# Altium PCB Control_Board.PcbDoc
Units mm, origin at the board's own origin, x right, y up, seen from the top; angles counter-clockwise.
Board outline 99 x 99 mm, 2 copper layers (Top Layer, Bottom Layer); 52 components, 36 nets, 165 pads, 17 vias.
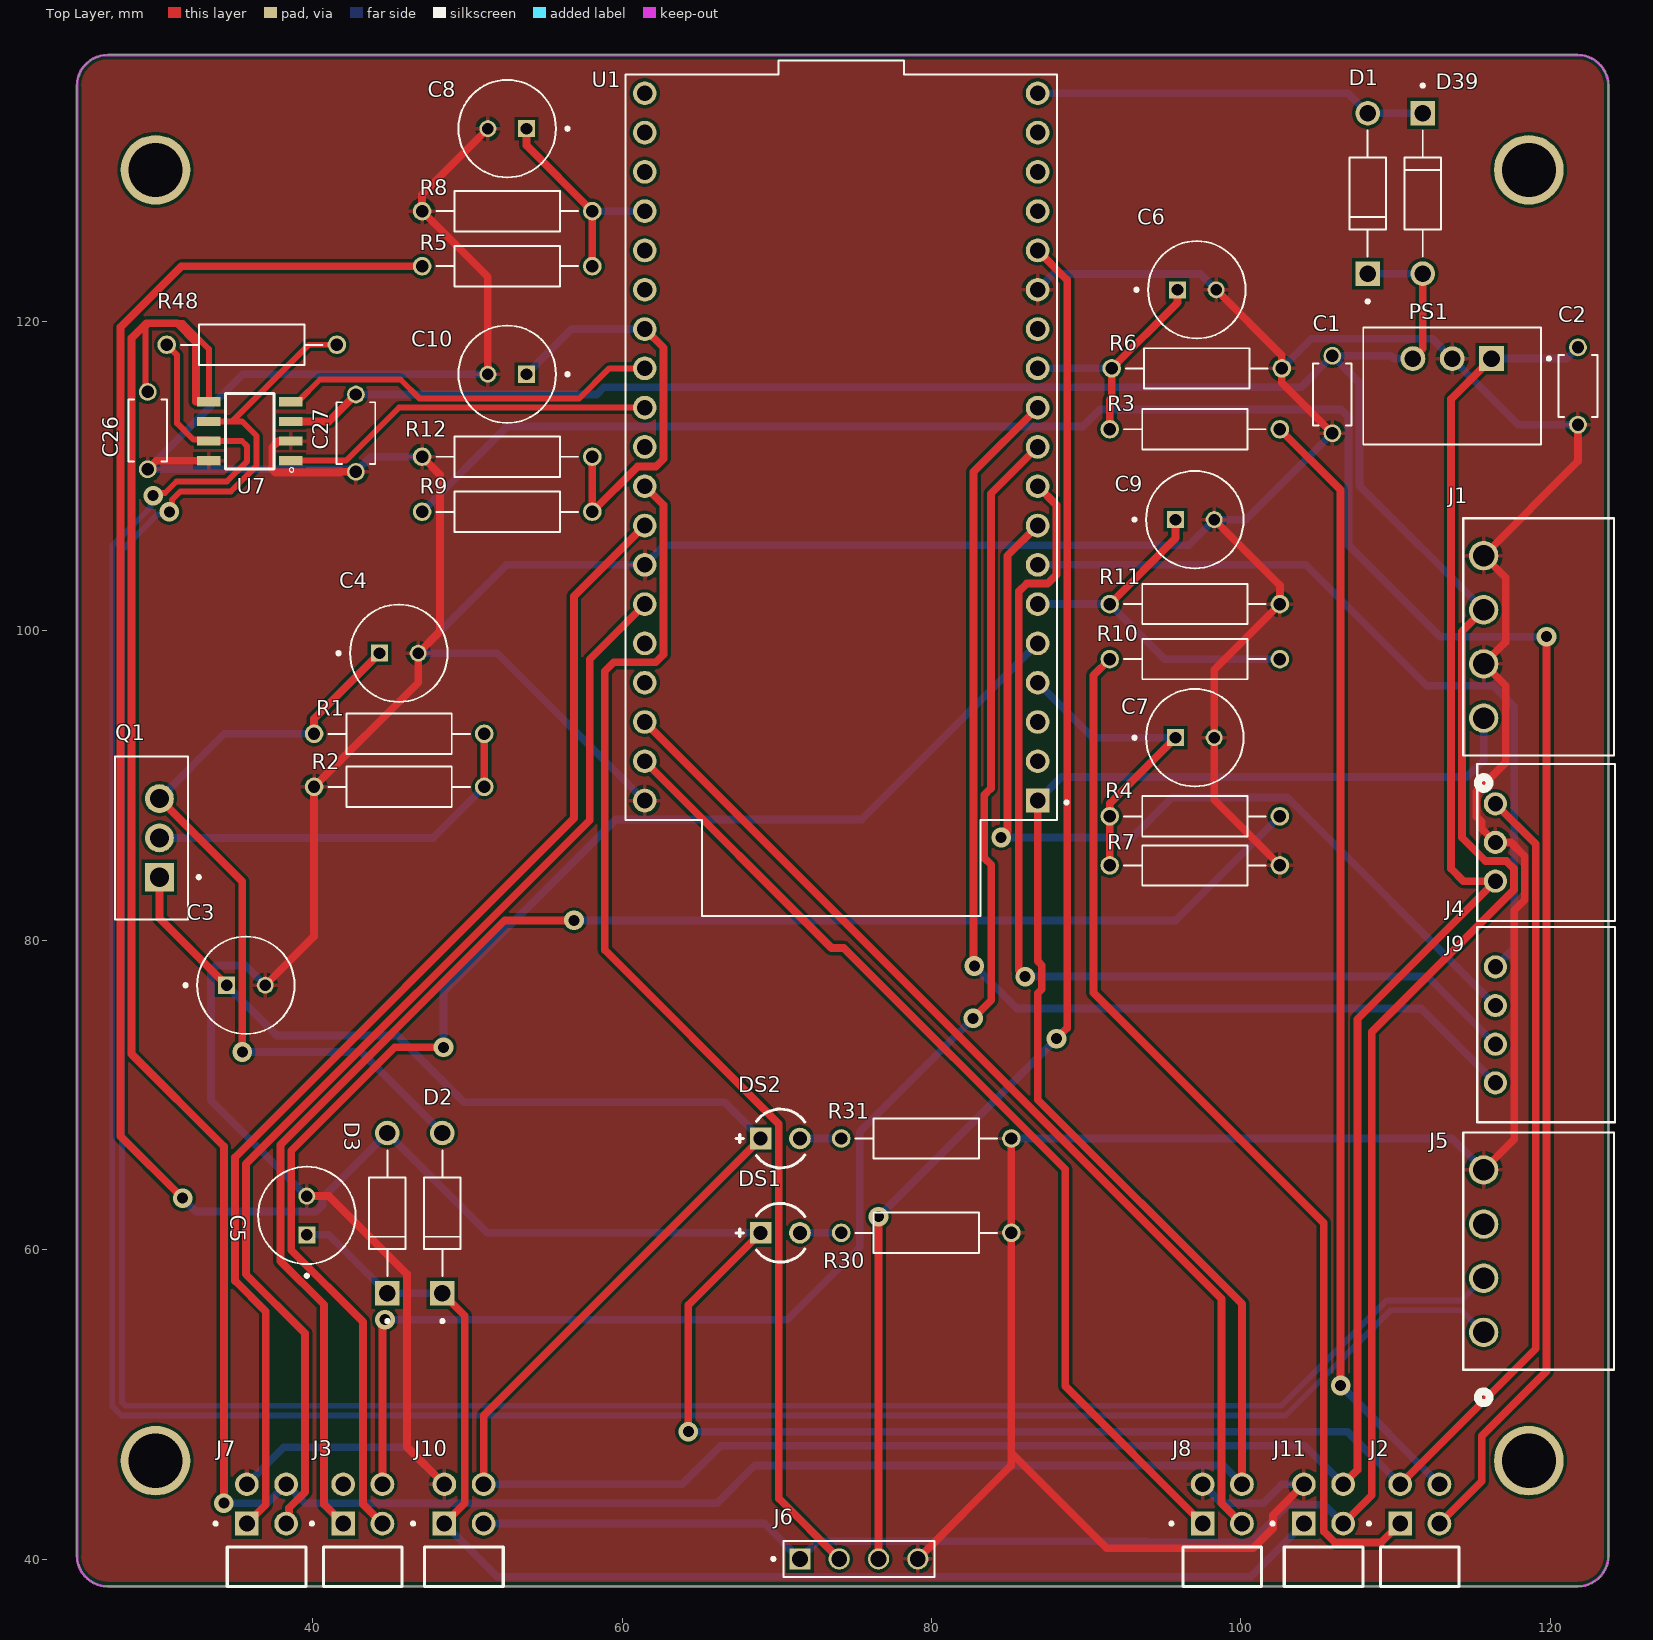
[diagram p0: Top Layer view]
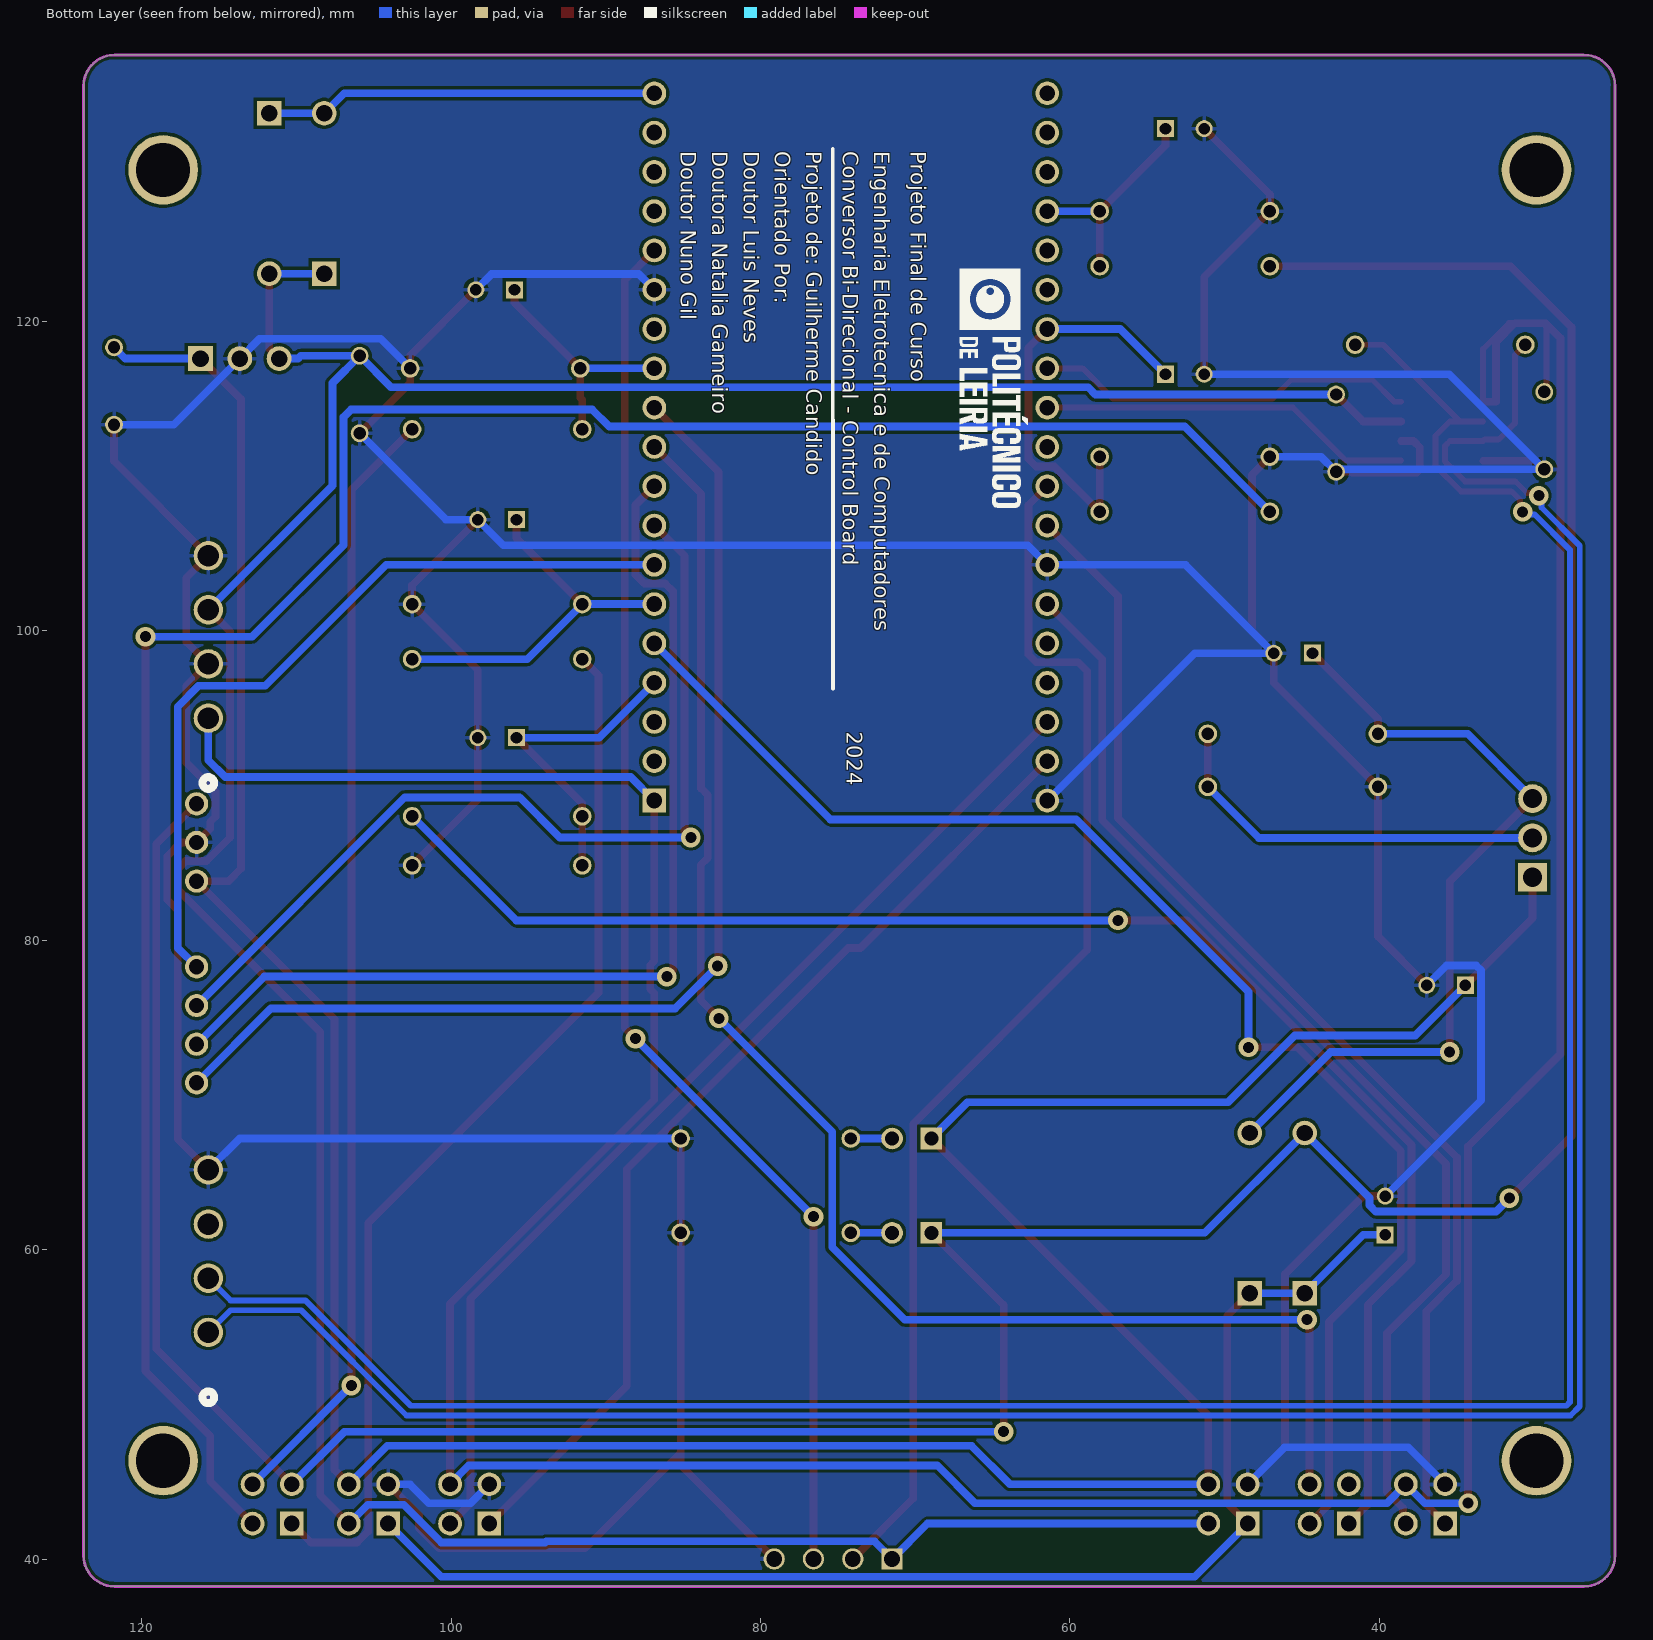
[diagram p1: Bottom Layer view, seen from below]
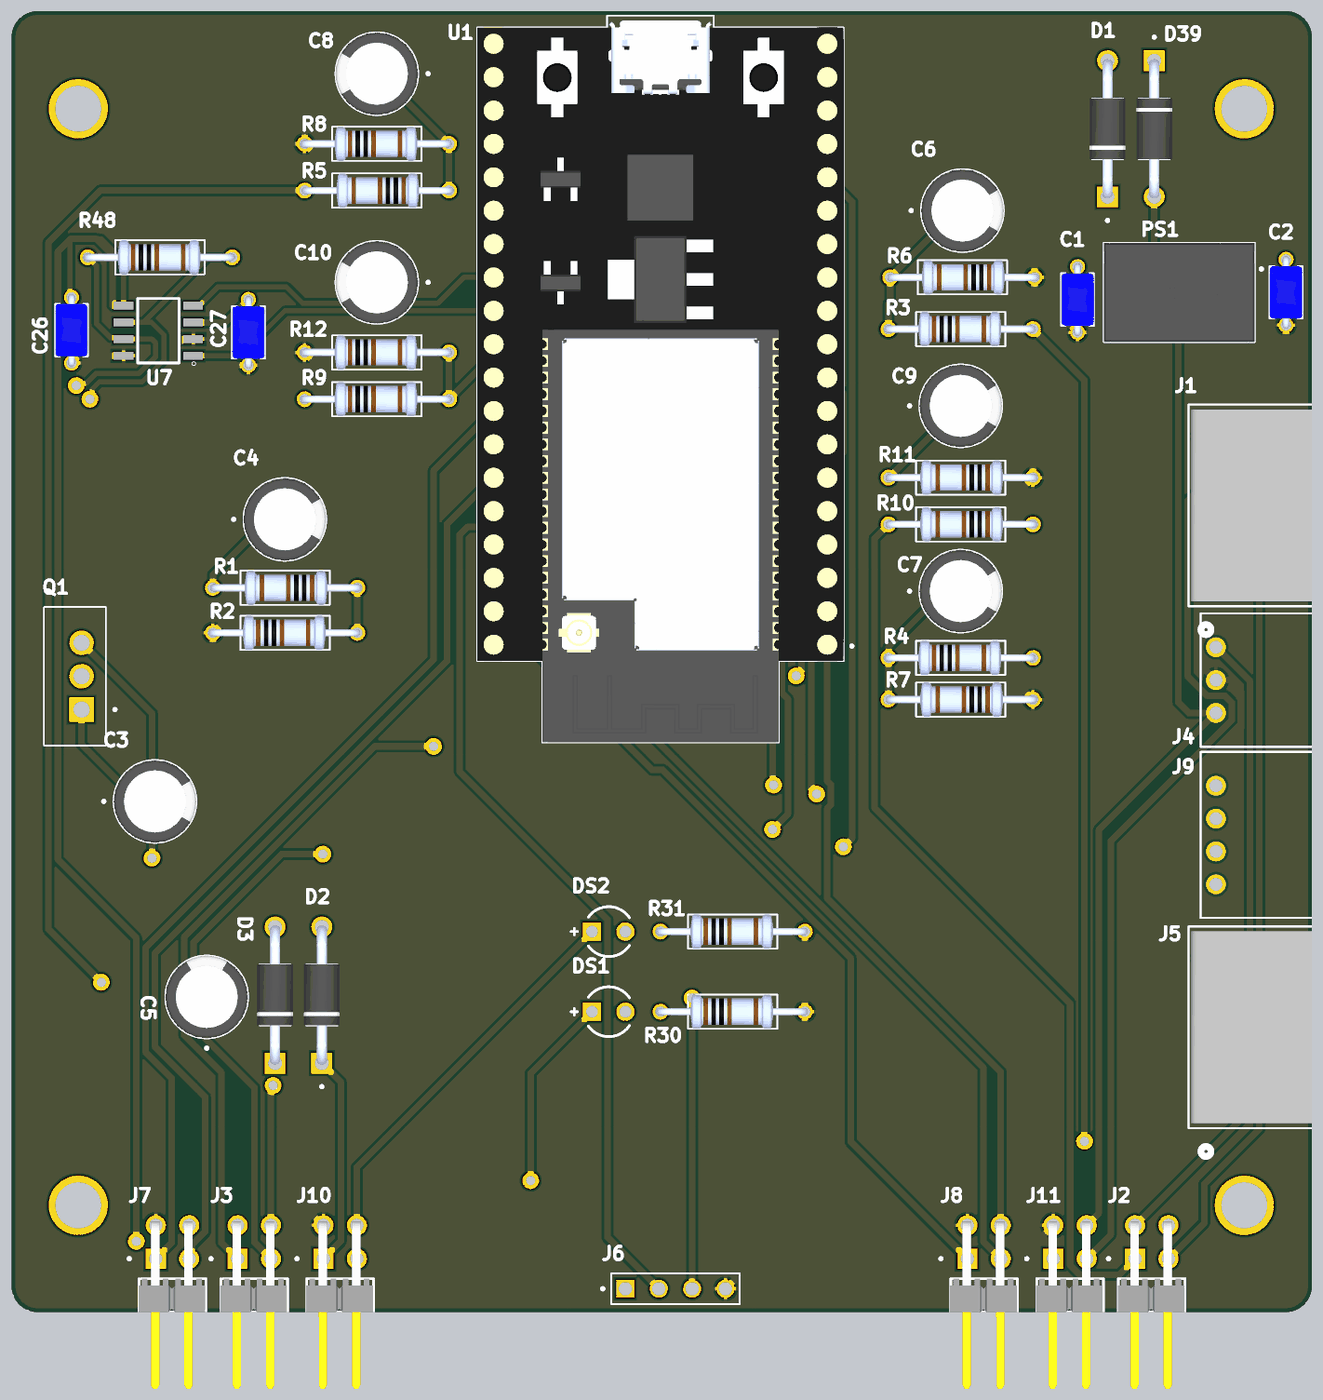
[diagram p2: 3D render of the assembled board from above, using the file's embedded part models]

## Layer stack, top to bottom
Top Solder: solder mask 0.0102, Solder Resist, Dk 3.5
Top Layer: signal copper 0.0356
Dielectric 1: dielectric 0.32, FR-4, Dk 4.8
Bottom Layer: signal copper 0.0356
Bottom Solder: solder mask 0.0102, Solder Resist, Dk 3.5

## Board outline
24.765,40.227 24.765,135.227 cw(c26.765,135.227) 26.765,137.227 121.765,137.227 cw(c121.765,135.227) 123.765,135.227 123.765,40.227 cw(c121.765,40.227) 121.765,38.227 26.765,38.227 cw(c26.765,40.227)

## Design rules (kind name [scope] priority, off if disabled: settings)
Clearance [All] p1: gap=0.2 ignorepadtopadclearanceinfootprint=TRUE
DiffPairsRouting [All] p1: maxlimit=0.254 minlimit=0.254 mostfreqgap=0.254 toplayer_minwidth=0.381 toplayer_maxwidth=0.381 toplayer_prefwidth=0.381 bottomlayer_minwidth=0.381 bottomlayer_maxwidth=0.381 bottomlayer_prefwidth=0.381 maxuncoupledlength=12.7
HoleSize [All] p1: absolutevalues=TRUE maxlimit=6.3 minlimit=0.3 maxpercent=80.000 minpercent=20.000
HoleToHoleClearance [All] p1: gap=0.5 allowstackedmicrovias=TRUE
PolygonConnect [All] p1: connectstyle=Relief reliefconductorwidth=0.254 reliefentries=4 polygonreliefangle="90 Angle" airgapwidth=0.254
RoutingVias [All] p1: holewidth=0.711 width=1.27 viastyle="Through Hole" minholewidth=0.3 minwidth=0.5 maxholewidth=6.3 maxwidth=10
SilkToSilkClearance [All] p1: silktosilkclearance=0
SolderMaskExpansion [All] p1: expansion=0.102 istentingtop=FALSE
UnRoutedNet [All] p1: checkbadconnections=TRUE
Width [All] p1: maxlimit=5 minlimit=0.127 preferedwidth=0.5 minimp=50.000000 maximp=50.000000 favimp=50.000000
25 further rules are at their usual default settings.

## Classes and differential pairs
component class "Signal Conditioning": C6 C7 C8 C9 C10 R3 R4 R5 R6 R7 R8 R9 R10 R11 R12
component class ESP32: C1 C2 D1 D39 PS1 U1
component class "driver VCC": C3 C4 C5 D2 D3 Q1 R1 R2
component class Connectors: DS1 DS2 J1 J2 J3 J4 J5 J6 J7 J8 J9 J10 J11 R30 R31
component class Communication: C26 C27 R48 U7
differential pair CAN_1: +CAN_1_P -CAN_1_N

## Components (designator, comment, footprint, x,y, rotation, side; value= is the part's Value field where it differs from the comment)
C1 "Ceramic Capacitor" "Ceramic Capacitor" 105.918,115.276 r90 top
C2 "Ceramic Capacitor" "Ceramic Capacitor" 121.793,115.824 r90 top
C3 "10uF Cap" CAP_10uF 35.687,77.089 r0 top
C4 "10uF" CAP_10uF 45.573,98.552 r0 top
C5 "10uF Cap" CAP_10uF 39.624,62.21 r90 top
C6 "10uF Cap" CAP_10uF 97.155,122.047 r0 top
C7 "10uF Cap" CAP_10uF 97.028,93.091 r0 top
C8 "10uF Cap" CAP_10uF 52.578,132.461 r180 top
C9 "10uF Cap" CAP_10uF 97.028,107.188 r0 top
C10 "10uF Cap" CAP_10uF 52.578,116.586 r180 top
C26 "Ceramic Capacitor" "Ceramic Capacitor" 29.337,112.943 r90 top
C27 "Ceramic Capacitor" "Ceramic Capacitor" 42.799,112.776 r90 top
D1 "Schottky Diode" "Common Trhough Hole" 108.204,128.27 r90 top
D2 "Schottky Diode" "Common Trhough Hole" 48.387,62.357 r90 top
D3 "Schottky Diode" "Common Trhough Hole" 44.831,62.357 r90 top
D39 "Schottky Diode" "Common Trhough Hole" 111.76,128.27 r270 top
DS1 "LTL-1CHE" LED3mm 70.231,61.087 r0 top
DS2 "LTL-1CHE" LED3mm 70.231,67.183 r0 top
J1 "4P - Right 3.5mm Industrial Connector" "4P - Right 3.5mm Industrial Connector" 115.697,94.361 r90 top
J2 "2x4-POS 2.54mm Male Header" "2x4-POS 2.54mm Male Header" 111.57,43.561 r0 top locked
J3 "2x4-POS 2.54mm Male Header" "2x4-POS 2.54mm Male Header" 43.244,43.561 r0 top locked
J4 "S3B-XH-A(LF)(SN)" "3P JST XH2.54mm 90º" 116.459,88.82 r270 top
J5 "4P - Right 3.5mm Industrial Connector" "4P - Right 3.5mm Industrial Connector" 115.697,54.651 r90 top
J6 "4-POS 2.54mm Header" "4-POS 2.54mm Header" 71.501,40.005 r0 top
J7 "2x4-POS 2.54mm Male Header" "2x4-POS 2.54mm Male Header" 37.02,43.561 r0 top locked
J8 "2x4-POS 2.54mm Male Header" "2x4-POS 2.54mm Male Header" 98.806,43.561 r0 top locked
J9 "S4B-XH-A(LF)(SN)" "4P JST XH2.54mm 90º" 116.459,78.279 r270 top
J10 "2x4-POS 2.54mm Male Header" "2x4-POS 2.54mm Male Header" 49.784,43.561 r0 top locked
J11 "2x4-POS 2.54mm Male Header" "2x4-POS 2.54mm Male Header" 105.346,43.561 r0 top locked
PS1 "R-78K5.0-0.5" CONV_R-78K5.0-0.5 113.665,115.824 r180 top
Q1 "LM7805CT" LM7805CT 30.099,86.614 r90 top
R1 "Resistor" "Resistor_Through Hole" 45.593,93.345 r180 top
R2 "Resistor" "Resistor_Through Hole" 45.593,89.916 r0 top
R3 "5.1K" "Resistor_Through Hole" 97.028,113.03 r0 top
R4 "5.1K" "Resistor_Through Hole" 97.028,88.011 r0 top
R5 "8.2K" "Resistor_Through Hole" 52.578,123.571 r180 top
R6 "10K" "Resistor_Through Hole" 97.155,116.967 r180 top
R7 "10K" "Resistor_Through Hole" 97.028,84.836 r180 top
R8 "1K" "Resistor_Through Hole" 52.578,127.127 r0 top
R9 "8.2K" "Resistor_Through Hole" 52.578,107.696 r0 top
R10 "5.1K" "Resistor_Through Hole" 97.028,98.171 r180 top
R11 "10K" "Resistor_Through Hole" 97.028,101.727 r180 top
R12 "1K" "Resistor_Through Hole" 52.578,111.252 r0 top
R30 "Resistor_Through Hole" "Resistor_Through Hole" 79.668,61.087 r0 top
R31 "Resistor_Through Hole" "Resistor_Through Hole" 79.668,67.183 r0 top
R48 "Resistor" "Resistor_Through Hole" 36.068,118.491 r0 top
U1 "ESP32-DEVKITC-32U" MODULE_ESP32-DEVKITC-32U 74.168,111.877 r180 top
U7 "MCP2562-E/SN" MCP2562-E/SN 35.941,112.903 r180 top
? "M3 Mounting Hole" "M3 - Mounting Hole"#1 120.396,46.355 r0 top
? "M3 Mounting Hole" "M3 - Mounting Hole"#2 29.845,46.355 r0 top
? "M3 Mounting Hole" "M3 - Mounting Hole"#2 118.618,129.794 r0 top
? "M3 Mounting Hole" "M3 - Mounting Hole"#2 29.845,129.794 r0 top

## Footprints (in the part's own frame and the unit in brackets; to place one, negate y for a bottom-side part, rotate by r counter-clockwise, add the part's x,y. Pads: shape width x height; smd on the part's side, far side on the other; paste and mask are expansions set on the pad)
"2x4-POS 2.54mm Male Header" [mm]
  rect 1.53x1.53 / inner round 1.53 / far side rect 1.53x1.53 hole 1.02: 1(-1.27,-1.27)
  round 1.53 hole 1.02: 2(-1.27,1.27) 3(1.27,-1.27) 4(1.27,1.27)
  silkscreen extent -3.39,-5.33 2.54,-1.17, body extent -2.59,-11.18 2.49,1.59, height 6.15
"3P JST XH2.54mm 90º" [mil]
  round 59 / inner round 60 / far side round 59 hole 39 paste-99999 mask+0: 1(0,0) 2(98.43,0) 3(196.86,0)
  silkscreen extent -101,-46 298,304, body extent -98,-10 295,285, height 236
"4-POS 2.54mm Header" [mm]
  rect 1.37x1.37 hole 1.02: 1(0,0)
  round 1.37 hole 1.02: 2(2.54,0) 3(5.08,0) 4(7.62,0)
  silkscreen extent -1.82,-1.17 8.69,1.17
"4P - Right 3.5mm Industrial Connector" [mil]
  round 75 / inner round 60 / far side round 75 hole 55 paste-99999 mask+0: 1(0,0) 2(137.8,0) 3(275.59,0) 4(413.39,0)
  silkscreen extent -180,-332 509,52, body extent -80,-317 494,45, height 274
"4P JST XH2.54mm 90º" [mil]
  round 59 / inner round 60 / far side round 59 hole 39 paste-99999 mask+0: 1(0,0) 2(98.42,0) 3(196.85,0) 4(295.28,0)
  silkscreen extent -101,-46 396,304, body extent -98,-10 394,285, height 236
CAP_10uF [mm]
  round 1.1 hole 0.75: N(1.25,0)
  rect 1.1x1.1 hole 0.75: P(-1.25,0)
  silkscreen extent -4,-3.15 3.15,3.15, body extent -3.15,-3.15 3.15,3.15, height 11.2
"Ceramic Capacitor" [mm] "22pF"
  round 1.15 hole 0.8: 1(-2.5,0) 2(2.5,0)
  silkscreen extent -2,-1.25 2,1.25, body extent -2.75,-1.25 2.75,1.25, height 5.5
"Common Trhough Hole" [mm]
  rect 1.59x1.59 / inner round 1.59 / far side rect 1.59x1.59 hole 1.06: 1(-5.18,0)
  round 1.59 hole 1.06: 2(5.18,0)
  silkscreen extent -7.07,-1.19 4.07,1.19, body extent -5.29,-1.36 5.29,1.36, height 2.72
CONV_R-78K5.0-0.5 [mm]
  rect 1.605x1.605 / inner round 1.605 / far side rect 1.605x1.605 hole 1.07: 1(-2.54,-1.775)
  round 1.605 hole 1.07: 2(0,-1.775) 3(2.54,-1.775)
  silkscreen extent -6.35,-3.77 5.75,3.77, body extent -5.75,-3.77 5.75,3.77, height 10.2
LED3mm [mm] "THD, 2-Leads, Dia 3.8mm, Pitch 2.54mm"
  rect 1.4x1.4 hole 0.9: 1(-1.27,0)
  round 1.4 hole 0.9: 2(1.27,0)
  silkscreen extent -2.87,-1.9 1.58,1.9, body extent -1.9,-1.9 1.9,1.9, height 6.5
LM7805CT [mm]
  rect 1.86x1.86 hole 1.24: 1(-2.54,0)
  round 1.86 hole 1.24: 2(0,0) 3(2.54,0)
  silkscreen extent -5.27,-2.64 5.27,2.86
"M3 - Mounting Hole"#1 [mm]
  round 4.5 / inner round 1.524 / far side round 4.5 hole 3.5: 1(-1.778,0)
"M3 - Mounting Hole"#2 [mm]
  round 4.5 / inner round 1.524 / far side round 4.5 hole 3.5: 1(0,0)
MCP2562-E/SN [mm]
  rect 1.5x0.6 smd: 1(-2.65,1.905) 2(-2.65,0.635) 3(-2.65,-0.635) 4(-2.65,-1.905) 5(2.65,-1.905) 6(2.65,-0.635) 7(2.65,0.635) 8(2.65,1.905)
  silkscreen extent -2.84,-2.45 1.58,2.64
MODULE_ESP32-DEVKITC-32U [mm]
  rect 1.53x1.53 / inner round 1.53 / far side rect 1.53x1.53 hole 1.02 mask+0.05: 1(-12.7,22.85)
  round 1.53 hole 1.02 mask+0.05: 2(-12.7,20.31) 3(-12.7,17.77) 4(-12.7,15.23) 5(-12.7,12.69) 6(-12.7,10.15) 7(-12.7,7.61) 8(-12.7,5.07) 9(-12.7,2.53) 10(-12.7,-0.01) 11(-12.7,-2.55) 12(-12.7,-5.09) 13(-12.7,-7.63) 14(-12.7,-10.17) 15(-12.7,-12.71) 16(-12.7,-15.25) 17(-12.7,-17.79) 18(-12.7,-20.33) 19(-12.7,-22.87) 20(12.7,-22.87) 21(12.7,-20.33) 22(12.7,-17.79) 23(12.7,-15.25) 24(12.7,-12.71) 25(12.7,-10.17) 26(12.7,-7.63) 27(12.7,-5.09) 28(12.7,-2.55) 29(12.7,-0.01) 30(12.7,2.53) 31(12.7,5.07) 32(12.7,7.61) 33(12.7,10.15) 34(12.7,12.69) 35(12.7,15.23) 36(12.7,17.77) 37(12.7,20.31) 38(12.7,22.85)
  silkscreen extent -14.67,-25 13.95,30.3, body extent -13.95,-24.62 13.95,30.3, height 7.95
"Resistor_Through Hole" [mm]
  round 1.2 hole 0.8: 1(-5.5,0) 2(5.5,0)
  silkscreen extent -4.58,-1.3 4.58,1.3, body extent -5.84,-1.29 5.71,1.29, height 2.6

## Part data
C1 C2 C26 C27: Package="0805 AVX", Availability="In Stock", Check_prices=https://www.snapeda.com/parts/LD051A121KAB2A/AVX/view-part/?ref=eda, MF=AVX, MP=LD051A121KAB2A, Price=None, Purchase-URL=https://pricing.snapeda.com/search/part/LD051A121KAB2A/?ref=eda, SnapEDA_Link=https://www.snapeda.com/parts/LD051A121KAB2A/AVX/view-part/?ref=snap
C3 C5 C6 C7 C8 C9 C10: "CAP ALUM 10UF 20% 50V RADIAL", Package="RADIAL-2 Panasonic", Availability="In Stock", Check_prices=https://www.snapeda.com/parts/ECE-A1HN100UI/Panasonic/view-part/2321690/?ref=eda, MF=Panasonic, MP=ECE-A1HN100UI, Price=None, SnapEDA_Link=https://www.snapeda.com/parts/ECE-A1HN100UI/Panasonic/view-part/2321690/?ref=snap
C4: library part "10uF Cap", "CAP ALUM 10UF 20% 50V RADIAL", Package="RADIAL-2 Panasonic", Availability="In Stock", Check_prices=https://www.snapeda.com/parts/ECE-A1HN100UI/Panasonic/view-part/2321690/?ref=eda, MF=Panasonic, MP=ECE-A1HN100UI, Price=None, SnapEDA_Link=https://www.snapeda.com/parts/ECE-A1HN100UI/Panasonic/view-part/2321690/?ref=snap
D1 D2 D3 D39: Package="DO-41 Diodes Inc.", Availability="In Stock", Check_prices=https://www.snapeda.com/parts/1N5817-T/Diodes+Inc./view-part/?ref=eda, MF="Diodes Inc.", MP=1N5817-T, Price=None, Purchase-URL=https://pricing.snapeda.com/search/part/1N5817-T/?ref=eda, SnapEDA_Link=https://www.snapeda.com/parts/1N5817-T/Diodes+Inc./view-part/?ref=snap
DS1 DS2: library part "RED_LED 3mm", "Radial LED, 12.6 mcd, 20 mA, 2 V, -55 to 100 degC, 2-Pin THD, RoHS, Bulk", Case\Package=Radial, Current Rating="3.6 A", Max Operating Temperature="130 degC", Min Operating Temperature="-40 degC", Package Quantity=55, Resistance="0.045 Ohm", Tolerance=20%, ComponentLink1Description="Manufacturer URL", ComponentLink1URL=http://www.us.liteon.com/, ComponentLink2Description=Datasheet, ComponentLink2URL=https://datasheet.ciiva.com/15117/getdatasheetpartid-187746-15117985.pdf, DatasheetVersion=Dec-03, Height="1.1 inch", Lead Pitch="11.44 mm", Length="0.97 inch", Mount="Through Hole", PackageDescription="2-Pin Through Hole Device, Dia 3.8 mm, Pitch 2.54 mm", PackageReference=LTL-1CHE, Packaging=Tray, Radiation Hardening=No, RoHSCompliant=true, Shielding=Unshielded, Width="0.62 inch"
J1 J2 J3 J5 J6 J7 J8 J10 J11 Q1: Package=None, Availability=Unavailable, Price=None
  J1 J5 J6: MP=5-146290-4
  J2 J3 J7 J8 J10 J11: Check_prices=https://www.snapeda.com/parts/613004243121/W%C3%BCrth%20Elektronik/view-part/1737074/?ref=eda, MF="WÃ¼rth Elektronik", MP=613004243121, SnapEDA_Link=https://www.snapeda.com/parts/613004243121/W%C3%BCrth%20Elektronik/view-part/1737074/?ref=snap
  Q1: MP=LM7805CT/NOPB
J4: library part "3P JST XH2.54mm 90º", "No Description Available", Mfr_Name=JST, Copyright="Copyright (C) 2024 Ultra Librarian. All rights reserved.", Manufacturer_Part_Number=S3B-XH-A(LF)(SN), RefDes=RefDes, Type=DEV
J9: library part "4P JST XH2.54mm 90º", "No Description Available", Mfr_Name=JST, Copyright="Copyright (C) 2024 Ultra Librarian. All rights reserved.", Manufacturer_Part_Number=S4B-XH-A(LF)(SN), RefDes=RefDes, Type=DEV
PS1: "0.5A DC/DC-Converter 'INNOLINE' SIP3 reg", Package=None, Availability="In Stock", Check_prices=https://www.snapeda.com/parts/R-78K5.0-0.5/Recom+Power/view-part/?ref=eda, MF="Recom Power", MP=R-78K5.0-0.5, Price=None, Purchase-URL=https://pricing.snapeda.com/search/part/R-78K5.0-0.5/?ref=eda, SnapEDA_Link=https://www.snapeda.com/parts/R-78K5.0-0.5/Recom+Power/view-part/?ref=snap
R1 R2 R48: Package=0805, Power_Rating=".25 W", Resistance=.33, Tolerance=1%, Availability="In Stock", Check_prices=https://www.snapeda.com/parts/2-2176053-0/TE+Connectivity/view-part/?ref=eda, EU_RoHS_Compliance="Compliant with Exemptions", MF="TE Connectivity", MP=2-2176053-0, Price=None, SnapEDA_Link=https://www.snapeda.com/parts/2-2176053-0/TE+Connectivity/view-part/?ref=snap
R3 R4 R5 R6 R7 R8 R9 R10 R11 R12: library part "Resistor_Through Hole", "1.02 Ohms Â±1% 0.25W, 1/4W Through Hole Resistor Axial Metal Film", Package="Axial Yageo", Availability=Warning, Check_prices=https://www.snapeda.com/parts/MFR-25FTE52-1R/Yageo/view-part/4629919/?ref=eda, MF=Yageo, MP=MFR-25FTE52-1R, Price=None, Purchase-URL=https://pricing.snapeda.com/search/part/MFR-25FTE52-1R/?ref=eda, SnapEDA_Link=https://www.snapeda.com/parts/MFR-25FTE52-1R/Yageo/view-part/4629919/?ref=snap
R30 R31: "1.02 Ohms Â±1% 0.25W, 1/4W Through Hole Resistor Axial Metal Film", Package="Axial Yageo", Availability=Warning, Check_prices=https://www.snapeda.com/parts/MFR-25FTE52-1R/Yageo/view-part/4629919/?ref=eda, MF=Yageo, MP=MFR-25FTE52-1R, Price=None, Purchase-URL=https://pricing.snapeda.com/search/part/MFR-25FTE52-1R/?ref=eda, SnapEDA_Link=https://www.snapeda.com/parts/MFR-25FTE52-1R/Yageo/view-part/4629919/?ref=snap
U1: "ESP32-WROOM-32UE series Transceiver; 802.11 b/g/n (Wi-Fi, WiFi, WLAN), BluetoothÂ® Smart Ready 4.x Dual Mode Evaluation Board", Package=None, Availability="In Stock", Check_prices=https://www.snapeda.com/parts/ESP32-DEVKITC-32U/Espressif+Systems/view-part/?ref=eda, MF="Espressif Systems", MP=ESP32-DEVKITC-32U, Price=None, Purchase-URL=https://pricing.snapeda.com/search/part/ESP32-DEVKITC-32U/?ref=eda, SnapEDA_Link=https://www.snapeda.com/parts/ESP32-DEVKITC-32U/Espressif+Systems/view-part/?ref=snap
U7: "1/1 Transceiver Half CANbus 8-SOIC", Package="SO-8 Microchip", Availability=Unavailable, MF=Microchip, MP=MCP2562-E/SN, Price=None, SnapEDA_Link=https://www.snapeda.com/parts/MCP2562-E/SN/Microchip/view-part/1055306/?ref=snap

## Via types
v1: diameter 1.27, hole 0.711, Top Layer to Bottom Layer, 17 vias

## Nets (pads, with @x,y where several pads share a name; then routed paths per layer and width w, separated by ;. In a path a pad name is that pad's centre, name@x,y a point inside that pad or via, vN(x,y) a via of type N, cw(c..) or ccw(c..) an arc to the next point about the centre after c; other vN are vias at no path point)
+3.3: C26.2 J1.1 J7.4 J8.4 U1.1 U7.5 | length 251
  Top Layer w0.381: C26.2 29.21,115.57 29.21,119.665 29.433,119.888 31.623,119.888 33.291,118.22 U7.5
  Top Layer w0.5: U7.5 32.461,114.808 32.461,118.669 31.242,119.888 29.433,119.888 29.261,119.888 28.296,118.923 28.296,72.644 34.265,66.675 v1(34.265,43.612) ; U1.1 86.868,78.657 87.14,78.384 87.14,76.835 86.868,76.563 86.868,69.697 100.076,56.489 J8.4
  Bottom Layer w0.5: v1(34.265,43.612) 37.071,43.612 J7.4 39.509,43.612 66.142,43.612 68.58,46.05 98.857,46.05 J8.4 ; U1.1 88.392,90.551 114.605,90.551 115.697,91.643 J1.1
+5: C1.2 C27.2 D1.1 D39.2 J1.3 J6.1 J10.3 J11.3 PS1.3 U7.3 | length 229.1
  Top Layer w0.5: U7.3 41.061,113.538 C27.2 ; J11.3 108.458,44.133 108.458,74.066 117.658,83.267 117.658,84.627 117.17,85.115 115.824,85.115 114.294,86.645 114.294,99.958 J1.3 ; PS1.3 111.76,118.234 D39.2
  Bottom Layer w0.5: C27.2 58.355,115.276 58.826,115.748 103.89,115.748 C1.2 ; J10.3 69.215,42.291 J6.1 72.644,41.148 93.853,41.148 93.929,41.072 100.635,41.072 103.073,43.51 105.397,43.51 J11.3 ; D1.1 D39.2 ; PS1.3 109.904,117.599 109.727,117.776 C1.2 ; J1.3 107.671,109.387 107.671,116.023 C1.2
+12: D3.2 DS1.1 J2.2 J4.1 R5.2 | length 232.8
  Top Layer w0.5: v1(31.598,63.322) 27.584,67.335 27.584,119.634 31.521,123.571 R5.2 ; v1(64.287,48.235) 64.287,56.413 DS1.1 ; J2.2 119.058,53.589 119.058,86.221 J4.1
  Bottom Layer w0.5: v1(31.598,63.322) 32.461,62.459 40.234,62.459 40.64,62.865 40.64,63.346 D3.2 51.281,61.087 DS1.1 ; v1(64.287,48.235) 106.896,48.235 J2.2
+24: C2.2 C3.P DS2.1 J4.3 J10.4 J11.4 PS1.1 Q1.1 | length 221
  Top Layer w0.5: Q1.1 30.099,81.427 C3.P ; J10.4 51.054,49.276 DS2.1 ; J11.4 107.536,45.751 107.536,74.897 J4.3 114.393,83.82 113.594,84.619 113.594,114.988 PS1.1
  Bottom Layer w0.5: C3.P 37.688,73.838 45.466,73.838 49.784,69.52 66.624,69.52 DS2.1 ; J10.4 63.881,44.831 66.37,47.32 104.127,47.32 J11.4 ; PS1.1 121.068,117.599 C2.2
CAN_1_N: J5.2 R48.2 U7.6 | length 172.1
  Top Layer w0.381: v1(30.734,107.696) 30.904,107.866 30.904,108.457 31.464,109.016 34.721,109.016 36.381,110.676 36.381,112.59 35.433,113.538 34.798,113.538 ; U7.6 34.798,113.538 ; R48.2 39.751,118.491 34.798,113.538
  Bottom Layer w0.381: v1(30.734,107.696) 30.564,107.526 29.973,107.526 27.686,105.238 27.686,50.134 27.909,49.911 102.624,49.911 109.431,56.719 114.264,56.719 J5.2
CAN_1_P: J5.1 R48.1 U7.7 | length 170.7
  Top Layer w0.381: v1(29.695,108.735) 29.865,108.906 30.455,108.906 31.201,109.651 34.458,109.651 35.746,110.939 35.746,111.955 35.433,112.268 U7.7 33.196,112.363 32.29,112.363 31.242,113.411 31.242,117.817 R48.1
  Bottom Layer w0.381: v1(29.695,108.735) 29.524,108.565 29.524,107.975 27.051,105.501 27.051,49.871 27.646,49.276 102.887,49.276 109.694,56.084 114.264,56.084 J5.1
GND: C1.1 C2.1 C3.N C4.N C5.N C6.N C7.N C8.N C9.N C10.N C26.1 C27.1 J1.2 J1.4 J4.2 J5.4 J6.4 J7.2 J8.2 J10.2 J11.2 PS1.2 R2.1 R6.1 R7.1 R8.1 R11.1 R12.1 R30.2 R31.2 U1.14 U1.32 U1.38 U7.2 U7.8 | length 479.9
  Top Layer w0.5: C26.1 29.892,110.998 U7.8 ; C3.N 40.093,80.245 R2.1 46.823,96.646 C4.N 48.235,99.964 48.235,110.095 R12.1 ; U7.2 37.795,112.268 37.389,111.862 37.389,110.439 37.592,110.236 41.794,110.236 41.834,110.276 C27.1 ; C5.N 41.061,63.46 46.101,58.42 46.101,47.244 J10.2 ; C10.N 51.328,122.877 R8.1 47.078,128.211 C8.N ; J6.4 85.168,46.052 85.168,46.861 ; R31.2 R30.2 85.168,46.861 ; C9.N 102.528,102.938 R11.1 98.278,97.477 C7.N 98.278,89.086 R7.1 ; C6.N 102.655,117.797 R6.1 102.655,116.039 C1.1 ; J11.2 102.083,42.838 102.083,41.986 100.787,40.691 91.338,40.691 85.168,46.861 ; J5.4 117.678,67.132 117.678,81.945 118.358,82.626 118.358,85.425 117.463,86.32 J4.2 115.571,87.208 115.571,87.652 115.24,87.983 115.24,89.611 117.119,91.491 117.119,96.439 J1.2 117.119,99.283 117.119,103.439 J1.4 121.793,110.957 C2.1
  Bottom Layer w0.5: J7.2 38.138,47.219 46.126,47.219 J10.2 ; C3.N 35.667,78.359 33.731,78.359 33.426,78.054 33.426,69.658 C5.N ; R12.1 43.775,111.252 C27.1 42.632,110.443 C26.1 35.48,116.586 C10.N ; U1.38 51.943,98.552 C4.N 52.538,104.267 U1.32 62.738,105.537 96.627,105.537 C9.N 100.33,107.188 C1.1 ; R31.2 113.665,67.183 J5.4 ; U1.14 87.884,123.063 97.389,123.063 C6.N ; J8.2 98.755,43.612 101.448,43.612 102.667,44.831 J11.2 ; R6.1 104.56,118.872 112.392,118.872 PS1.2 117.94,113.324 C2.1
NetC4_P: C4.P D2.2 Q1.3 R1.2 | length 52.4
  Top Layer w0.5: Q1.3 35.458,83.795 v1(35.458,72.771) ; R1.2 40.093,94.322 C4.P
  Bottom Layer w0.5: Q1.3 34.29,93.345 R1.2 ; v1(35.458,72.771) 43.153,72.771 D2.2
NetC5_P: C5.P D2.1 D3.1 J10.1 J11.1 | length 84.8
  Top Layer w0.5: D2.1 49.835,55.729 49.835,43.612 J10.1
  Bottom Layer w0.5: C5.P 41.048,60.96 D3.1 D2.1 ; J10.1 51.943,38.862 100.647,38.862 J11.1
NetC6_P: C6.P R3.1 R6.2 U1.12 | length 15.6
  Top Layer w0.5: R3.1 91.528,114.935 91.655,115.062 R6.2 95.905,121.217 C6.P
  Bottom Layer w0.5: U1.12 R6.2
NetC7_P: C7.P R4.1 R7.2 U1.4 | length 20.4
  Top Layer w0.5: R7.2 R4.1 91.528,88.841 C7.P
  Bottom Layer w0.5: U1.4 90.424,93.091 C7.P
NetC8_P: C8.P R5.1 R8.2 U1.23 | length 14
  Top Layer w0.5: C8.P 53.828,131.377 R8.2 R5.1
  Bottom Layer w0.5: R8.2 U1.23
NetC9_P: C9.P R10.1 R11.2 U1.6 | length 24.4
  Top Layer w0.5: R11.2 95.778,105.977 C9.P
  Bottom Layer w0.5: U1.6 R11.2 95.084,98.171 R10.1
NetC10_P: C10.P R9.2 R12.2 U1.26 | length 27.3
  Top Layer w0.5: R12.2 R9.2 60.999,110.617 62.179,110.617 62.687,111.125 62.687,118.288 U1.26
  Bottom Layer w0.5: C10.P 56.749,119.507 U1.26
NetD1_2: D1.2 D39.1 U1.19 | length 25.4
  Bottom Layer w0.5: U1.19 106.907,134.747 D1.2 D39.1
NetDS1_2: DS1.2 R30.1 | length 2.7
  Bottom Layer w0.5: DS1.2 R30.1
NetDS2_2: DS2.2 R31.1 | length 2.7
  Bottom Layer w0.5: DS2.2 R31.1
NetJ2_1: J2.1 R10.2 | length 68.7
  Top Layer w0.5: R10.2 90.475,97.118 90.475,76.606 105.359,61.722 105.359,41.783 106.07,41.072 109.081,41.072 J2.1
NetJ2_3: J2.3 R9.1 | length 146.5
  Top Layer w0.5: J2.3 115.57,45.021 115.57,47.955 119.761,52.146 v1(119.761,99.619)
  Bottom Layer w0.5: R9.1 52.59,113.208 89.789,113.208 90.881,114.3 106.477,114.3 106.959,113.817 106.959,105.537 112.878,99.619 v1(119.761,99.619)
NetJ2_4: J2.4 R3.2 | length 72.5
  Top Layer w0.5: R3.2 106.451,109.107 v1(106.451,51.22)
  Bottom Layer w0.5: v1(106.451,51.22) J2.4
NetJ3_1: J3.1 R4.2 | length 99.6
  Top Layer w0.5: J3.1 40.742,43.523 40.742,56.442 37.924,59.26 37.924,66.779 52.425,81.28 v1(56.896,81.28)
  Bottom Layer w0.5: v1(56.896,81.28) 95.797,81.28 R4.2
NetJ3_3: J3.3 U1.5 | length 90.5
  Top Layer w0.5: J3.3 43.256,43.549 43.256,55.328 38.624,59.96 38.624,66.386 45.314,73.076 v1(48.463,73.076)
  Bottom Layer w0.5: v1(48.463,73.076) 48.463,76.657 59.614,87.808 75.489,87.808 U1.5
NetJ3_4: J3.4 U1.10 | length 100.2
  Top Layer w0.5: J3.4 44.514,55.309 v1(44.679,55.474) ; v1(82.702,74.955) 83.871,76.124 83.871,84.869 83.421,85.319 83.421,89.39 83.845,89.814 83.845,108.864 U1.10
  Bottom Layer w0.5: v1(44.679,55.474) 70.688,55.474 75.362,60.147 75.362,67.615 v1(82.702,74.955)
NetJ6_2: J6.2 U1.30 | length 79.3
  Top Layer w0.5: U1.30 62.687,108.128 62.687,98.476 62.179,97.968 59.461,97.968 58.877,97.384 58.877,79.375 70.129,68.123 70.129,43.917 J6.2
NetJ6_3: J6.3 U1.15 | length 90.4
  Top Layer w0.5: J6.3 v1(76.581,62.128) ; U1.15 88.783,122.672 88.783,74.33 v1(88.087,73.635)
  Bottom Layer w0.5: v1(76.581,62.128) v1(88.087,73.635)
NetJ7_1: J7.1 U1.31 | length 76.8
  Top Layer w0.5: J7.1 36.965,43.506 36.965,55.999 34.987,57.977 34.987,65.975 56.896,87.884 56.896,102.235 U1.31
NetJ7_3: J7.3 U1.33 | length 72.2
  Top Layer w0.5: J7.3 38.481,42.482 38.481,43.304 39.505,44.328 39.505,54.602 35.687,58.42 35.687,65.532 57.912,87.757 57.912,98.171 U1.33
NetJ8_1: J8.1 U1.37 | length 64.7
  Top Layer w0.5: U1.37 73.541,79.494 74.342,79.494 88.646,65.19 88.646,51.181 J8.1
NetJ8_3: J8.3 U1.36 | length 67.8
  Top Layer w0.5: U1.36 98.751,56.824 98.751,43.616 J8.3
NetJ9_1: J9.1 U1.7 | length 51.9
  Bottom Layer w0.5: U1.7 104.191,104.267 112.014,96.444 116.332,96.444 117.678,95.098 117.678,79.498 J9.1
NetJ9_2: J9.2 U1.8 | length 59.7
  Top Layer w0.5: v1(84.506,86.639) 84.912,87.046 84.912,104.851 U1.8
  Bottom Layer w0.5: v1(84.506,86.639) 92.989,86.639 95.58,89.23 103.008,89.23 J9.2
NetJ9_3: J9.3 U1.9 | length 66.4
  Top Layer w0.5: v1(86.055,77.648) 85.649,78.054 85.649,102.544 86.157,103.052 87.503,103.052 88.083,103.632 88.083,108.132 U1.9
  Bottom Layer w0.5: v1(86.055,77.648) 112.09,77.648 J9.3
NetJ9_4: J9.4 U1.11 | length 74.6
  Top Layer w0.5: v1(82.779,78.334) 82.721,78.391 82.721,110.28 U1.11
  Bottom Layer w0.5: v1(82.779,78.334) 85.522,75.59 111.648,75.59 J9.4
NetQ1_2: Q1.2 R1.1 R2.2 | length 25.8
  Top Layer w0.5: R2.2 R1.1
  Bottom Layer w0.5: Q1.2 47.791,86.614 R2.2
NetU1_27: U1.27 U7.4 | length 24.8
  Top Layer w0.381: U7.4 39.041,114.808 40.474,116.242 45.684,116.242 46.917,115.008 57.223,115.008 59.182,116.967 U1.27
NetU1_28: U1.28 U7.1 | length 24.3
  Top Layer w0.381: U7.1 42.156,110.998 45.585,114.427 U1.28
pads on no net: ?.1 J3.2 J5.3 U1.2 U1.3 U1.13 U1.16 U1.17 U1.18 U1.20 U1.21 U1.22 U1.24 U1.25 U1.29 U1.34 U1.35

## Polygon pours and split planes (outlines as drawn)
GND on Top Layer "GND_L01_P000" (solid, remove dead copper, pour order 0): 24.765,40.227 24.765,135.227 cw(c26.765,135.227) 26.765,137.227 121.765,137.227 cw(c121.765,135.227) 123.765,135.227 123.765,40.227 cw(c121.765,40.227) 121.765,38.227 26.765,38.227 cw(c26.765,40.227)
GND on Bottom Layer "GND_L02_P001" (solid, remove dead copper, pour order 1): 24.765,40.227 24.765,135.227 cw(c26.765,135.227) 26.765,137.227 121.765,137.227 cw(c121.765,135.227) 123.765,135.227 123.765,40.227 cw(c121.765,40.227) 121.765,38.227 26.765,38.227 cw(c26.765,40.227)

## Keep-outs
Keep-Out Layer:
  the board outline again, w0.18

## Silkscreen, mask and mechanical layers (free items; w line width, h text height)
Bottom Overlay:
  drawing of 23 lines, arcs and shapes, not listed
  text "Projeto Final de Curso" at 70.279,131.008 h1 r90
  text "Engenharia Eletrotecnica e de Computadores" at 72.644,131.008 h1 r90
  text "Conversor Bi-Direcional - Control Board" at 74.675,131.008 h1 r90
  text "Projeto de: Guilherme Candido" at 77.04,131.008 h1 r90
  text "Orientado Por:" at 79.072,131.008 h1 r90
  text "Doutor Luis Neves" at 81.103,131.008 h1 r90
  text "Doutora Natalia Gameiro" at 83.135,131.008 h1 r90
  text "Doutor Nuno Gil" at 85.166,131.008 h1 r90
  text "2024" at 74.422,93.472 h1 r90

## Text inside footprints (layer, text, board x,y; h text height)
J2: Mechanical 13 "PCB Edge" at 114.58,38.361 h1.02
J3: Mechanical 13 "PCB Edge" at 46.254,38.361 h1.02
J7: Mechanical 13 "PCB Edge" at 40.03,38.361 h1.02
J8: Mechanical 13 "PCB Edge" at 101.816,38.361 h1.02
J10: Mechanical 13 "PCB Edge" at 52.794,38.361 h1.02
J11: Mechanical 13 "PCB Edge" at 108.356,38.361 h1.02